# EAGLE board Board (EAGLE 6.6.0)
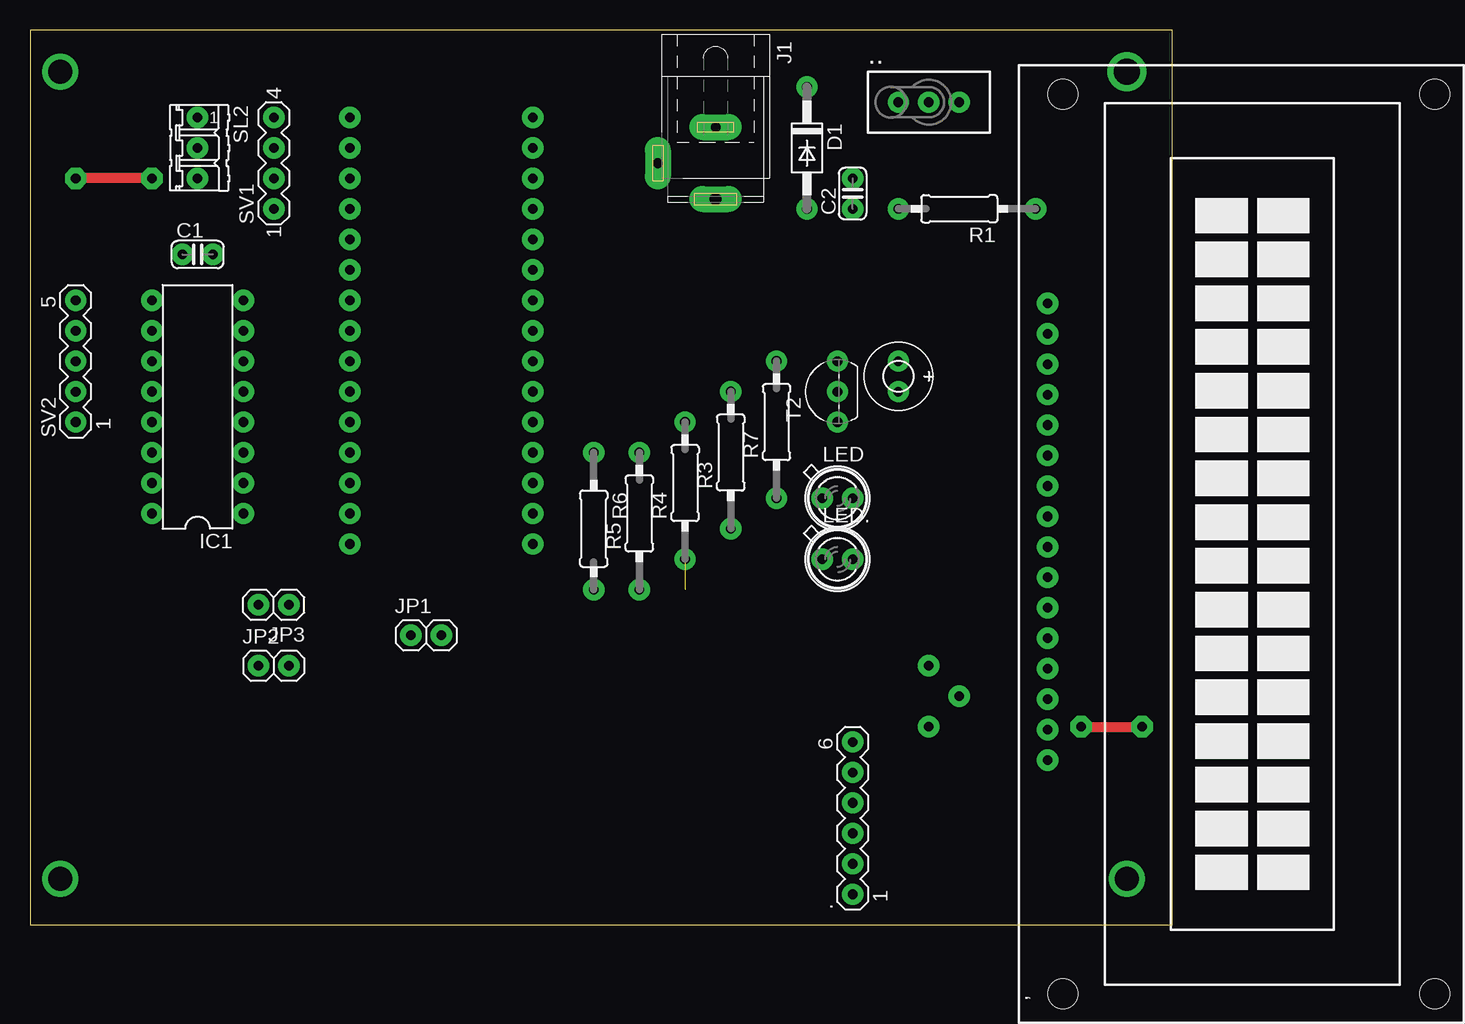
[diagram p0: board, top side]
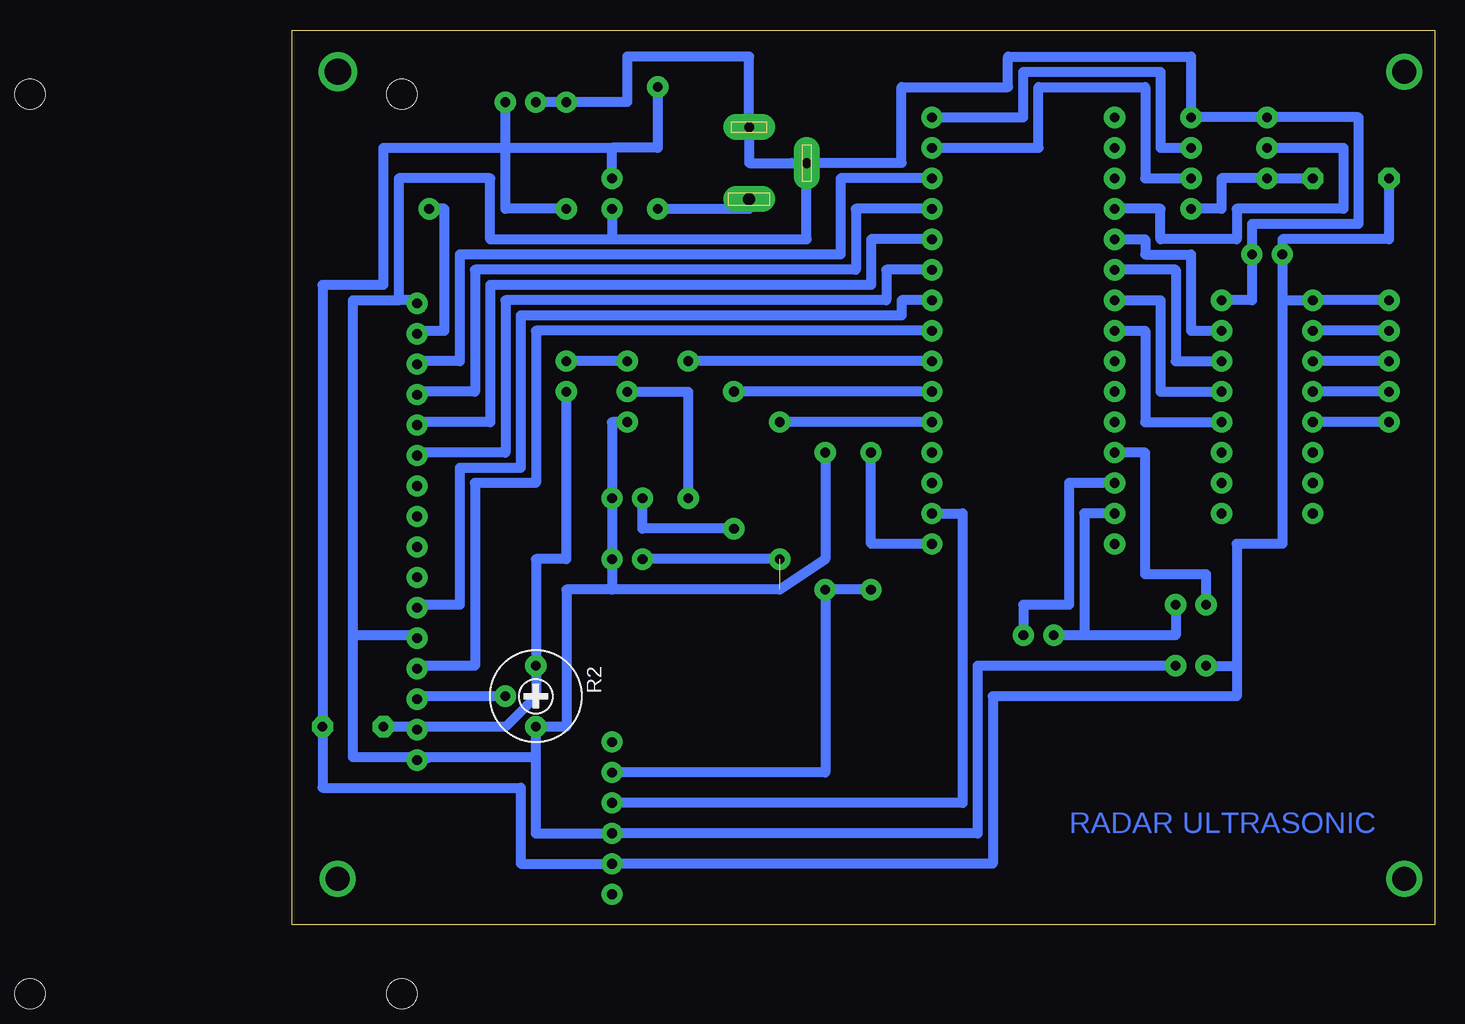
[diagram p1: board, bottom side, seen from below]

Size 95.23 x 74.6 mm. Coordinates in mm from the lower left corner, seen from the top.
Outline: 0,0 95.23,0 95.23,74.6 0,74.6 0,0
Copper layers (1*16): Top 0.035mm / dielectric 1.5mm / Bottom 0.035mm
Design rules "default": minimum track width 10mil, minimum drill 24mil, track to track 8mil, track to pad 8mil, pad to pad 8mil, via to via 8mil, smd to smd 8mil, copper to edge 40mil, drill to drill 8mil, minimum pad ring 10mil, minimum via ring 8mil, stop-mask expansion 4mil, vias tented up to drill 0mil, thermal gap 10mil

## Footprints (pad centres in the part's own frame; a part is rotated, then mirrored left to right if it is on the bottom)
TUXGR_16X2_R2 = drill 0.8 pad 1.778: 1 -18.03,16.77; 2 -15.49,16.77; 3 -12.95,16.77; 4 -10.41,16.77; 5 -7.87,16.77; 6 -5.33,16.77; 7 -2.79,16.77; 8 -0.25,16.77; 9 2.29,16.77; 10 4.83,16.77; 11 7.37,16.77; 12 9.91,16.77; 13 12.45,16.77; 14 14.99,16.77; 15 17.53,16.77; 16 20.07,16.77 | hole 2.5: -37.5,-15.5; 37.5,-15.5; -37.5,15.5; 37.5,15.5
MA06-1 = drill 0.8 pad 1.778: 1 -6.35,0; 2 -3.81,0; 3 -1.27,0; 4 1.27,0; 5 3.81,0; 6 6.35,0
TL3XPO = drill 0.8 pad 1.778: 1 -2.54,0; 2 0,0; 3 2.54,0
C025-024X044 = drill 0.8 pad 1.778: 1 -1.27,0; 2 1.27,0
DO41-10 = drill 0.8 pad 1.778: A 5.08,0; C -5.08,0
DIL16 = drill 0.8 pad 1.778: 1 -8.89,-3.81; 2 -6.35,-3.81; 3 -3.81,-3.81; 4 -1.27,-3.81; 5 1.27,-3.81; 6 3.81,-3.81; 7 6.35,-3.81; 8 8.89,-3.81; 9 8.89,3.81; 10 6.35,3.81; 11 3.81,3.81; 12 1.27,3.81; 13 -1.27,3.81; 14 -3.81,3.81; 15 -6.35,3.81; 16 -8.89,3.81
SPC4077 = drill 0.8 pad 2.184 long: 1 -3,0; 2 0,-4.8 | drill 1 pad 2.184 long: 3 3,0
1X02 = drill 0.8 pad 1.778: 1 -1.27,0; 2 1.27,0
SFH482 = drill 0.8 pad 1.778: A -1.27,0; K 1.27,0
0207/10 = drill 0.813 pad 1.778: 1 -6.35,0; 2 5.08,0
RTRIM3339P = drill 0.8 pad 1.778: 1 -2.54,0; 2 0,-2.54; 3 2.54,0
F/TMB = drill 0.8 pad 1.778: + 1.27,0; - -1.27,0
03P = drill 0.8 pad 1.778: 1 -2.54,0; 2 0,0; 3 2.54,0
MA04-1 = drill 0.8 pad 1.778: 1 -3.81,0; 2 -1.27,0; 3 1.27,0; 4 3.81,0
MA05-1 = drill 0.8 pad 1.778: 1 -5.08,0; 2 -2.54,0; 3 0,0; 4 2.54,0; 5 5.08,0
TO92-EBC-OVAL = drill 0.8 pad 1.778: B 0,-1.27; C 2.54,-1.27; E -2.54,-1.27
NANO = drill 0.8 pad 1.778: 3.3V -10.16,24.13; 5V -10.16,-1.27; A0 -10.16,19.05; A1 -10.16,16.51; A2 -10.16,13.97; A3 -10.16,11.43; A4 -10.16,8.89; A5 -10.16,6.35; A6 -10.16,3.81; A7 -10.16,1.27; AREF -10.16,21.59; D2 5.08,1.27; D3 5.08,3.81; D4 5.08,6.35; D5 5.08,8.89; D6 5.08,11.43; D7 5.08,13.97; D8 5.08,16.51; D9 5.08,19.05; D10 5.08,21.59; D11 5.08,24.13; D12 5.08,26.67; D13 -10.16,26.67; GND -10.16,-6.35; GND1 5.08,-1.27; RAW -10.16,-8.89; RST -10.16,-3.81; RST1 5.08,-3.81; RX1 5.08,-6.35; TX0 5.08,-8.89

## Placement (x,y rotation side)
,  TUXGR_16X2_R2  [TUXGR_16X2_R2]  101.6,31.75 90 top
.  [MA06-1]  68.58,8.89 90 top
..  TL32PO  [TL3XPO]  74.93,68.58 0 top
C1  15 pF  [C025-024X044]  13.97,55.88 0 top
C2  10 uF  [C025-024X044]  68.58,60.96 90 top
D1  1N4004  [DO41-10]  64.77,64.77 270 top
IC1  ULN2003AN  [DIL16]  13.97,43.18 90 top
J1  [SPC4077]  57.15,63.5 270 top
JP1  [1X02]  33.02,24.13 0 top
JP2  [1X02]  20.32,21.59 0 top
JP3  [1X02]  20.32,26.67 180 top
LED  SFH482  [SFH482]  67.31,35.56 0 top
LED.  SFH482  [SFH482]  67.31,30.48 0 top
R1  390 kΩ  [0207/10]  77.47,59.69 180 top
R2  10 kΩ  [RTRIM3339P]  74.93,19.05 270 bottom
R3  390 Ω  [0207/10]  58.42,39.37 90 top
R4  220 Ω  [0207/10]  54.61,36.83 90 top
R5  2.2 kΩ  [0207/10]  50.8,34.29 90 top
R6  1 kΩ  [0207/10]  46.99,33.02 270 top
R7  220 Ω  [0207/10]  62.23,41.91 90 top
SG1  F/TMB  [F/TMB]  72.39,45.72 270 top
SL2  [03P]  13.97,64.77 270 top
SV1  [MA04-1]  20.32,63.5 90 top
SV2  [MA05-1]  3.81,46.99 90 top
T2  2N2222  [TO92-EBC-OVAL]  66.04,44.45 90 top
U$2  NANO  [NANO]  36.83,40.64 0 top

## Library data of the parts
, = display-lcd; OC_FARNELL: unknown; OC_NEWARK: unknown
. SV1 SV2 = con-lstb; OC_FARNELL: unknown; OC_NEWARK: unknown
.. = switch
C1 C2 = rcl
D1 = diode
IC1 = uln-udn
J1 = con-jack; OC_FARNELL: unknown; OC_NEWARK: unknown
JP1-JP3 = pinhead
LED LED. = led
R1-R7 = resistor
SG1 = buzzer; OC_FARNELL: unknown; OC_NEWARK: unknown
SL2 = con-amp-quick; OC_FARNELL: unknown; OC_NEWARK: unknown
T2 = adafruit
U$2 = Arduino-clone

## Nets
+5V: ,.2 ..2 ...3 C1.1 C2.2 D1.C IC1.9 JP2.1 R1.2 R2.1 SG1.+ SL2.3 SV1.1 SV2.5
GND: ,.1 ,.5 ,.16 ..3 ...1 ...2 C1.2 C2.1 IC1.8 J1.1 J1.2 JP2.2 LED..A LED..K LED.K R2.3 R4.1 R5.2 SL2.1 SV1.4 T2.E
N$1: ,.3 R2.2
N$2: ,.15 R1.1
N$3: R4.2 U$2.D2
N$4: R3.2 U$2.D3
N$5: LED.A R3.1
N$6: R7.2 U$2.D4
N$7: R7.1 T2.B
N$8: IC1.7 U$2.A1
N$9: IC1.6 U$2.A2
N$10: ,.14 U$2.D10
N$11: ,.13 U$2.D9
N$12: SV1.2 U$2.D11
N$13: SV1.3 U$2.D12
N$14: IC1.5 U$2.A3
N$15: IC1.4 U$2.A4
N$16: ,.12 U$2.D8
N$17: IC1.13 SV2.1
N$18: IC1.12 SV2.2
N$19: IC1.11 SV2.3
N$20: IC1.10 SV2.4
N$21: JP1.1 JP3.1 U$2.GND
N$22: ,.11 U$2.D7
N$23: JP1.2 U$2.RST
N$26: SG1.- T2.C
N$27: ,.6 U$2.D6
N$28: SL2.2 U$2.A0
N$29: ,.4 U$2.D5
N$32: R6.1 U$2.TX0
N$33: ..5 R5.1 R6.2
N$34: ..4 U$2.RX1
N$36: JP3.2 U$2.5V
N$37: D1.A J1.3

## Tracks (layer width: path | path; a pad name or v marks a point on that pad's centre or on a via)
+5V  (via drill 0.8 pad 1.78)
  Top 0.813: v10.16,62.23 v3.81,62.23 | v87.63,16.51 v92.71,16.51
  Bottom 0.813: v10.16,62.23 SL2.3 17.78,62.23 17.78,59.69 SV1.1 | v3.81,62.23 3.81,57.15 12.7,57.15 C1.1 12.7,52.07 | SV2.5 IC1.9 12.7,52.07 | 12.7,52.07 12.7,31.75 16.51,31.75 16.51,21.59 | 16.51,21.59 16.51,19.05 36.83,19.05 36.83,5.08 ..2 76.2,5.08 76.2,11.43 92.71,11.43 v92.71,16.51 92.71,53.34 87.63,53.34 87.63,64.77 77.47,64.77 | 77.47,64.77 68.58,64.77 | 84.83,16.51 77.47,16.51 74.93,19.05 R2.1 74.93,30.48 72.39,30.48 SG1.+ | 84.83,16.51 v87.63,16.51 | JP2.1 16.51,21.59 | D1.C 64.77,64.77 68.58,64.77 | C2.2 68.58,64.77 | R1.2 77.47,59.69 77.47,64.77 | 77.47,64.77 ...3 | 84.83,16.51 ,.2
GND  (1 unrouted)
  Bottom 0.813: IC1.8 15.24,52.07 C1.2 15.24,58.42 6.35,58.42 6.35,67.31 SL2.1 SV1.4 20.32,72.39 35.56,72.39 35.56,69.85 44.45,69.85 44.45,63.5 J1.2 | 74.93,13.97 83.82,13.97 | ,.1 83.82,13.97 | 83.82,13.97 90.17,13.97 90.17,24.13 | 90.17,24.13 90.17,52.07 86.36,52.07 | ,.5 85.09,24.13 90.17,24.13 | 86.36,52.07 86.36,62.23 78.74,62.23 78.74,57.15 68.58,57.15 | 68.58,57.15 52.35,57.15 J1.2 | 53.62,63.5 J1.2 | J1.2 57.15,63.5 J1.1 57.15,72.39 67.31,72.39 67.31,68.58 ...1 ...2 | C2.1 68.58,57.15 | 74.93,13.97 74.93,7.62 ..3 38.1,7.62 38.1,21.59 JP2.2 | 74.93,13.97 R2.3 72.39,16.51 72.39,27.94 68.58,27.94 | ,.16 85.09,51.82 85.09,52.07 86.36,52.07 | T2.E 68.58,41.91 LED.K LED..K 68.58,27.94 | R4.1 LED..A | R5.2 50.8,30.48 54.61,27.94 68.58,27.94
N$1
  Bottom 0.813: R2.2 84.83,19.05 ,.3
N$2
  Bottom 0.813: ,.15 84.83,49.53 82.55,49.53 82.55,59.69 R1.1
N$3
  Bottom 0.813: U$2.D2 R4.2
N$4
  Bottom 0.813: U$2.D3 R3.2
N$5
  Bottom 0.813: R3.1 66.04,33.02 LED.A
N$6
  Bottom 0.813: U$2.D4 R7.2
N$7
  Bottom 0.813: T2.B 62.23,44.45 R7.1
N$8
  Bottom 0.813: IC1.7 20.32,49.53 20.32,55.88 24.13,55.88 24.13,57.15 U$2.A1
N$9
  Bottom 0.813: IC1.6 21.59,46.99 21.59,54.61 U$2.A2
N$10
  Bottom 0.813: U$2.D10 49.53,62.23 49.53,55.88 81.28,55.88 81.28,46.99 84.83,46.99 ,.14
N$11
  Bottom 0.813: U$2.D9 48.26,59.69 48.26,54.61 80.01,54.61 80.01,44.45 84.83,44.45 ,.13
N$12
  Bottom 0.813: U$2.D11 33.02,64.77 33.02,69.85 24.13,69.85 24.13,62.23 SV1.2
N$13
  Bottom 0.813: U$2.D12 34.29,67.31 34.29,71.12 22.86,71.12 22.86,64.77 SV1.3
N$14
  Bottom 0.813: U$2.A3 22.86,52.07 22.86,44.45 IC1.5
N$15
  Bottom 0.813: U$2.A4 24.13,49.53 24.13,41.91 IC1.4
N$16
  Bottom 0.813: U$2.D8 46.99,57.15 46.99,53.34 78.74,53.34 78.74,41.91 84.83,41.91 ,.12
N$17
  Bottom 0.813: SV2.1 IC1.13
N$18
  Bottom 0.813: SV2.2 IC1.12
N$19
  Bottom 0.813: SV2.3 IC1.11
N$20
  Bottom 0.813: SV2.4 IC1.10
N$21
  Bottom 0.813: JP3.1 21.59,24.13 29.21,24.13 | 29.21,24.13 JP1.1 | U$2.GND 29.21,34.29 29.21,24.13
N$22
  Bottom 0.813: U$2.D7 45.72,54.61 45.72,52.07 77.47,52.07 77.47,39.37 84.83,39.37 | 85.09,39.37 84.83,39.37 | 84.83,39.37 ,.11
N$23
  Bottom 0.813: U$2.RST 30.48,36.83 30.48,26.67 34.29,26.67 JP1.2
N$24  (via drill 2.2 pad 2.54)
  other vias: 91.44,71.12
N$25  (via drill 2 pad 2.54)
  other vias: 91.44,3.81
N$26
  Bottom 0.813: T2.C SG1.-
N$27
  Bottom 0.813: U$2.D6 44.45,52.07 44.45,50.8 76.2,50.8 76.2,38.1 81.28,38.1 81.28,26.67 84.83,26.67 ,.6
N$28
  Bottom 0.813: SL2.2 7.62,64.77 7.62,59.69 16.51,59.69 16.51,57.15 22.86,57.15 22.86,59.69 U$2.A0
N$29
  Bottom 0.813: U$2.D5 74.93,49.53 74.93,36.83 80.01,36.83 80.01,21.59 84.83,21.59 ,.4
N$30  (via drill 2 pad 2.54)
  other vias: 2.54,71.12
N$31  (via drill 2 pad 2.54)
  other vias: 2.54,3.81
N$32
  Bottom 0.813: U$2.TX0 46.99,31.75 R6.1
N$33
  Bottom 0.813: R6.2 R5.1 50.8,12.7 ..5
N$34
  Bottom 0.813: U$2.RX1 39.37,34.29 39.37,10.16 ..4
N$36
  Bottom 0.813: JP3.2 19.05,29.21 24.13,29.21 24.13,39.37 U$2.5V
N$37
  Bottom 0.813: D1.A 57.15,59.69 J1.3

## Text on the board
Bottom: RADAR ULTRASONIC